# Altium PCB Gateway.PcbDoc (part 2 of 2)
Units mil, origin at the board's own origin, x right, y up, seen from the top; angles counter-clockwise.
Board outline 3149.61 x 3909.45 mil, 2 copper layers (Top Layer, Bottom Layer); 140 components, 140 nets, 576 pads, 80 vias.
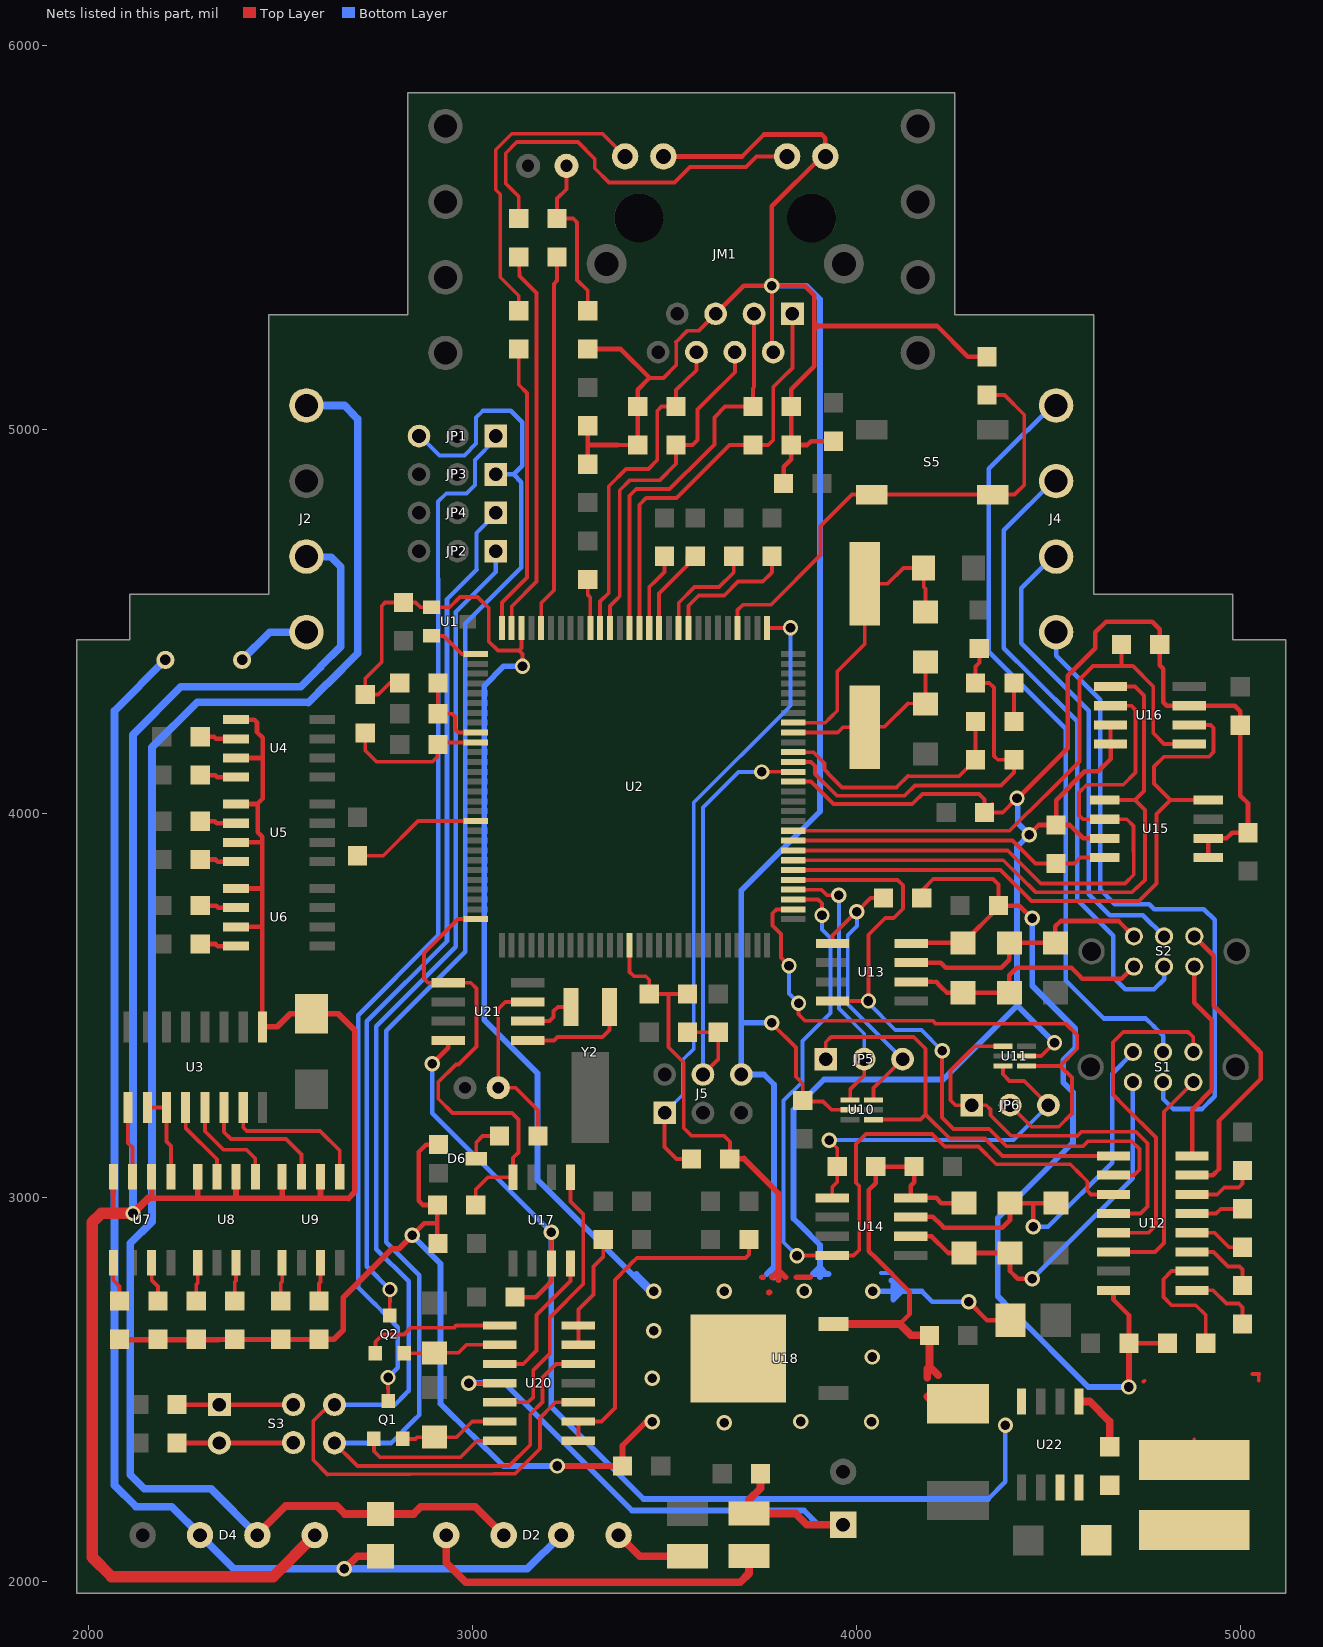
[diagram p2: the nets of this part, all layers, seen from the top]

## Via types
v1: diameter 40, hole 25, Top Layer to Bottom Layer, 80 vias

## Nets (pads, with @x,y where several pads share a name; then routed paths per layer and width w, separated by ;. In a path a pad name is that pad's centre, name@x,y a point inside that pad or via, vN(x,y) a via of type N, cw(c..) or ccw(c..) an arc to the next point about the centre after c; other vN are vias at no path point) (continued)
IIC_1: R28.2 U2.112 U17.4 U21.5 | length 1255.8
  Top Layer w10: R28.2@3008,2980 3008,3020 3040.2,3052.2 U17.4@3105,3052.2 3105,3102.94 3119,3116.94 3119,3184 3119,3203 3102.51,3219.49 2947.83,3219.49 2910.43,3256.89 2910.43,3300.2 2956.13,3345.89 2963,3345.89 3009.86,3392.75 3009.86,3395.19 3009.86,3544.14 2995,3559 U21.5@2936.65,3559 2884,3559 2873,3570 2873,3636 2961.69,3724.69 U2.112@3008.23,3724.69
IO_AAG_0: JP1.1 Q1.3 | length 2756
  Top Layer w10: v1(2779.53,2530.51) Q1.3@2780,2469.21
  Bottom Layer w10: 2745,2722 2745.52,2722 ; 2910,4611 2910,4813 2931,4834 2984,4834 3006,4856 3006,4921 JP1.1@3060.16,4975.16 ; JP1.1@3060.16,4974.53 JP1.1@3060.16,4983.39
  Bottom Layer w12: 2745,2722 2702,2765 2701.77,3469.5 2701.77,3474.77 2900,3673 2910,3683 2910,4611 ; 2745.52,2722 2779.53,2687.99 2779.53,2687.47 2805,2662 2805,2555.98 v1(2779.53,2530.51) ; JP1.1@3060.16,4975.16 JP1.1@3060.16,4983.39
IO_AAG_1: JP4.1 Q2.3 | length 2255.2
  Top Layer w10: Q2.3@2784,2692.21 v1(2784.45,2759.84)
  Bottom Layer w10: 3009.84,4634.84 3009.84,4730.31 3060.16,4780.63 JP4.1@3060.16,4783.39
  Bottom Layer w12: v1(2784.45,2759.84) 2725,2819 2724.41,2819.59 2724.41,3458.66 2933.07,3667.32 2933.07,4558.07 3009.84,4634.84
IO_AAG_2: JP2.1 S3.4 U20.10 | length 3561.4
  Top Layer w10: S3.4@2632.78,2465.91 2633.78,2465.91 2584.78,2416.91 2584.78,2334.91 2584.78,2315.22 2622,2278 3055,2280 3110,2280 3175,2345 3175,2425 3208.51,2458.51 3208.51,2458.87 3215.64,2466 U20.10@3275.36,2466
  Bottom Layer w12: S3.4@2640,2460 2797.6,2460 2826,2488.4 2826,2489 2833,2496 2833,2751 2833,2781 2749.02,2864.98 2749.02,2871.98 2749.02,2875.98 2749,3446 2956,3653 2956,4525 3060.16,4629.16 JP2.1@3060.16,4683.39
IO_AAG_3: JP1.3 JP3.1 S3.3 U20.12 | length 4338.1
  Top Layer w10: S3.3@2634.09,2365.91 2633.78,2365.91 2699.68,2300 3040,2300 3095,2300 3150,2355 3150,2435 3182,2467 3182,2531 3217,2566 U20.12@3275.36,2566
  Bottom Layer w10: JP1.3@2860.16,4983.39 2863.07,4983.39 2913.39,4933.07 2978.35,4933.07 3008.86,4963.58 3008.86,5031.5 3026.57,5049.21
  Bottom Layer w12: S3.3@2640,2360 2788,2360 2848,2420 2861,2433 2861,2797 2848,2810 2848,2809.75 2775,2882.75 2775,3434 2981,3640 2981,4495 3125.97,4639.97 3126.97,4639.97 3126.97,4647.97 3126.97,4863.19 3106.81,4883.35 ; 3026.57,5049.21 3099.41,5049.21 3128.94,5019.69 3128.94,4905.51 3106.81,4883.39 JP3.1@3060.16,4883.39
NetBT1_1: BT1.1 R42.1 U21.3 | length 484
  Top Layer w10: U21.3@3143.35,3509 3085.39,3509 3085,3509 3066.61,3490.61 BT1.1@3066.61,3285.56 3111.44,3285.56 3170,3227 R42.1@3170,3160
NetC1_1: C1.1 R2.1 U2.48 Y1.1 | length 474.1
  Top Layer w10: U2.48@3835,4210.91 U2.48@3835,4210.91 3951.06,4210.91 3964.8,4224.64 Y1.1@4021.42,4224.64 4073.64,4226.64 4134,4287 C1.1@4180,4285 ; C1.1@4179.92,4265.08 4179.92,4363.35
NetC2_1: C2.1 R2.2 U2.49 Y1.2 | length 776.1
  Top Layer w10: U2.49@3835,4236.5 3918.58,4236.5 3932.36,4250.28 3949.8,4267.72 3949.8,4370.08 4021.42,4441.69 Y1.2@4021.42,4598.66 4081,4598.66 4122.34,4640 C2.1@4175,4640 4175,4590 4180,4585 R2.2@4180,4525
NetC3_2: C3.2 L1.1 U2.93 | length 243.5
  Top Layer w10: C3.2@2907.87,4260 C3.2@2914.21,4260 ; L1.1@2910,4360 C3.2@2910,4260 2946,4260 2953.74,4252.26 2953.74,4220.47 2963.31,4210.91 U2.93@3008.23,4210.91
NetC4_1: C4.1 U2.102 | length 345.8
  Top Layer w10: C4.1@2700,3890 2766.97,3890 2857.56,3980.59 2871.77,3980.59 U2.102@3008.23,3980.59
NetC6_1: C6.1 U2.65 | length 351.3
  Top Layer w10: U2.65@3562.36,4483.54 3562.36,4541.35 3589,4568 3655.57,4568 3691.57,4604 3755.7,4604 3778.7,4627 ; 3780,4628.3 C6.1@3780,4670
NetC9_2: C9.2 U2.68 | length 217.3
  Top Layer w10: U2.68@3485.59,4483.54 3485.59,4572.83 3560,4647.24 C9.2@3560,4670
NetC10_2: C10.2 U2.69 | length 203.2
  Top Layer w10: U2.69@3460,4483.54 3460,4590 3480,4609.57 3500,4629.57 C10.2@3500,4670
NetC12_2: C12.2 U2.75 | length 125.7
  Top Layer w10: C12.2@3300,4606.54 3300,4569.09 3306.46,4562.64 U2.75@3306.46,4483.54
NetC13_2: C13.2 R4.1 U2.46 | length 650.5
  Top Layer w10: U2.46@3835,4159.73 3887.52,4159.73 3912.4,4134.84 3916.34,4130.91 3916.34,4114.17 3935.04,4095.47 3962.6,4067.91 4103.91,4067.91 ; 4105.77,4069.77 4134,4098 4267,4097 C13.2@4310,4140 R4.1@4310,4240
NetC16_2: C16.2 R4.2 | length 100
  Top Layer w10: R4.2@4410,4240 C16.2@4410,4340
NetC19_2: C19.2 L2.1 U2.94 | length 386.5
  Top Layer w10: L2.1@2720,4210 2720,4164 2749.16,4134.84 2765.75,4134.84 2895.67,4134.84 2907.87,4147.05 2907.87,4180 2913.19,4185.32 U2.94@3008.23,4185.32
NetC20_2: C20.2 J5.4 R26.2 U2.44 | length 1175.5
  Top Layer w10: R26.2@3560,3430 C20.2@3640,3430 3640,3360 J5.4@3600,3320 ; v1(3752.95,4108.27) 3753.23,4108.54 U2.44@3835,4108.54
  Bottom Layer w10: J5.4@3600,3320 3600,4015.35 3692.91,4108.27 v1(3752.95,4108.27)
NetC21_1: C21.1 U12.3 | length 192.7
  Top Layer w10: U12.3@4874.22,2857.71 4930.29,2857.71 4968,2820 4998,2820 5006,2812 C21.1@5006,2770
NetC21_2: C21.2 U12.1 | length 193.3
  Top Layer w10: U12.1@4874.22,2757.71 4929.29,2757.71 4964,2723 4996,2723 5006,2713 C21.2@5006,2670
NetC22_1: C22.1 U12.4 | length 147.4
  Top Layer w10: U12.4@4874.22,2907.71 4932.29,2907.71 4970,2870 C22.1@5006,2870
NetC22_2: C22.2 U12.5 | length 136.9
  Top Layer w10: U12.5@4874.22,2957.71 4936.71,2957.71 4949,2970 C22.2@5006,2970
NetC25_2: C25.2 U12.2 | length 332.4
  Top Layer w10: U12.2@4874.22,2807.71 4820.95,2807.71 4799.69,2786.45 4799.69,2740.31 4821,2719 4884,2719 4910,2693 C25.2@4910,2620
NetC26_1: C26.1 U12.6 | length 177.5
  Top Layer w10: U12.6@4874.22,3007.71 4939.71,3007.71 4958,3026 4996,3026 5006,3036 C26.1@5006,3070
NetC37_1: C37.1 D3.2 L3.1 U22.8
NetC37_2: C37.2 U22.1 | length 167.6
  Top Layer w20: U22.1@4579.92,2468.2 4607.58,2468.2 4660,2415.79 C37.2@4660,2350
NetD2_1: D2.1 L5.1 | length 202.8
  Top Layer w20: D2.1@3380,2120 3435.12,2064.88 L5.1@3560,2064.88
NetD2_2: D2.2 D4.2 F1.2 V1.2 | length 3604
  Top Layer w20: v1(2665,2032) 2666,2032 2698.88,2064.88 V1.2@2760,2064.88
  Bottom Layer w20: F1.2@2199.37,4400 2067,4268 2066.93,4228.35 2066.93,2250.07 2123,2194 2216,2194 2289.61,2120.39 D4.2@2289.61,2120 2290,2120 2378,2032 3142.39,2032 D2.2@3230.39,2120
NetD2_3: D2.3 L4.1 | length 937.4
  Top Layer w20: D2.3@2931.18,2120 2931.18,2047.82 2981.95,1997.05 3595.81,1997.05 3620.05,1997.05 3697.05,1997.05 3720,2020 L4.1@3720,2065.88
NetD2_4: D2.4 D4.4 J2.4 V1.1 | length 4433.5
  Top Layer w20: D4.4@2439.21,2120 2439.21,2122.21 2513,2196 2646,2196 2666.88,2175.12 V1.1@2760,2175.12 2846.12,2175.12 2865,2194 3006.79,2194 D2.4@3080.79,2120
  Bottom Layer w20: 2164.57,4172.26 2282.32,4290 2572,4289 2621.58,4338.58 2622.05,4338.58 2700.79,4417.32 2700.79,5027.56 2666,5063 J2.4@2566.93,5062.99 ; 2164.57,4172.26 2164.57,2937.57 2164.57,2936.57 2108,2880 2108,2304 2108,2277 2144,2241 2318.21,2241 D4.4@2439.21,2120
NetD5_1: D5.1 R5.1 R6.1 | length 451.7
  Top Layer w10: R6.1@3300,5310 3300,5362 3272,5390 3272,5540 3262,5550 R5.1@3220,5550 3220,5602 3244.33,5626.33 D5.1@3244.33,5687.52 ; D5.1@3244.33,5687.52 3244.33,5684.33 D5.1@3244.33,5687.52
NetD6_3: D6.3 R42.2 | length 111
  Top Layer w10: D6.3@3009.21,3100 3009.21,3143.21 3026,3160 R42.2@3070,3160
NetF1_1: F1.1 J2.1 | length 200.7
  Bottom Layer w20: F1.1@2399,4400 2471,4472 J2.1@2566.93,4472.44 J2.1@2566.93,4475.39
NetJ4_1: J4.1 S1.2 | length 1711.3
  Bottom Layer w12: J4.1@4520,4472.44 4520,4411 4635,4296 4635,3890 4635,3802 4673,3764 4763,3764 4776,3751 4792,3751 4905,3751 4933,3723 4933,3263 4900,3230 4825,3230 4798.74,3256.26 S1.2@4798.74,3300
NetJ4_2: J4.2 S2.2 | length 1250.4
  Bottom Layer w10: J4.2@4509.53,4676.85 J4.2@4520,4676.85
  Bottom Layer w12: J4.2@4520,4676.85 4518.85,4676.85 4429,4587 4429,4444 4480,4393 4605,4268 4605,3875 4605,3790 4660,3735 4746.26,3735 S2.2@4801.26,3680
NetJ4_3: J4.3 S2.5 | length 1667.5
  Bottom Layer w10: J4.3@4520,4870.39 J4.3@4520,4873.7
  Bottom Layer w12: J4.3@4520,4873.7 4519.7,4873.7 4384,4738 4384,4431 4456,4359 4575,4240 4575,3775 4669,3681 4669,3573 4700,3542 4775,3542 4801.26,3568.26 S2.5@4801.26,3601.26
NetJ4_4: J4.4 S1.5 | length 2020.1
  Bottom Layer w10: J4.4@4520,5068.58 J4.4@4520,5070.55
  Bottom Layer w12: J4.4@4517.55,5070.55 4371,4924 4345,4898 4345,4421 4438,4328 4545,4221 4545,3565 4644,3466 4754,3466 4775,3445 4798.74,3421.26 S1.5@4798.74,3378.74
  Bottom Layer w15: J4.4@4517.55,5070.55 J4.4@4520,5070.55
NetJ5_1: J5.1 R1.2 U2.57 | length 1632.9
  Top Layer w10: J5.1@3500,3220 3500,3130.91 3530.91,3100 R1.2@3570,3100 ; U2.57@3767.09,4483.54 3827.54,4483.54 v1(3828,4484)
  Bottom Layer w10: J5.1@3500,3220 3547.24,3267.24 3547.24,3358.27 3575.79,3386.81 ; 3575.79,4028.54 3815.94,4268.7 3828,4280.76 v1(3828,4484) ; 3576,3387 3576,4028.73
NetJM1_1: JM1.1 R7.2 U2.70 | length 1088.9
  Top Layer w10: U2.70@3434.41,4483.54 3434.41,4780.87 3434.41,4804.41 3452,4822 3531,4822 3669,4960 R7.2@3730,4960 3770,4960 3783,4973 3783,5110.76 3805.12,5132.87 3833.03,5160.79 JM1.1@3833.03,5301.93
NetJM1_3: JM1.3 R8.1 U2.71 | length 1054.9
  Top Layer w10: U2.71@3408.82,4483.54 3408.82,4808.42 3408.82,4827.82 3426,4845 3513,4845 3605,4937 3629.61,4961.61 3629.61,5032 3657.61,5060 3696,5060 ; 3688,5060 R8.1@3730,5060 3730,5108 3733.03,5111.03 3733.03,5163.15 JM1.3@3733.03,5301.93 ; R8.1@3713.43,5068.86 R8.1@3713.58,5068.03
NetJM1_4: JM1.4 R9.2 U2.73 | length 928.7
  Top Layer w10: U2.73@3357.64,4483.54 3357.64,4540.46 3376.97,4559.79 3376.97,4559.97 3383,4566 3383,4842 3409,4868 3487,4868 3530,4911 R9.2@3530,4960 3573,4960 3586,4973 3586,5052.54 3612,5078.54 3683.03,5149.57 JM1.4@3683.03,5201.93 ; R9.2@3550.2,4956.73 R9.2@3553.46,4960
NetJM1_6: JM1.6 R10.1 U2.74 | length 879.1
  Top Layer w10: U2.74@3332.05,4483.54 3332.05,4552.41 3354.33,4574.69 3354.33,4852.63 3399.61,4897.91 3457.91,4897.91 3481,4921 3481,5049 3492,5060 R10.1@3530,5060 3530,5103 3555,5128 3583.03,5154.88 JM1.6@3583.03,5201.93
NetJM1_GK: JM1.GK R11.1 | length 824.4
  Top Layer w10: R11.1@3120,5310 3120,5349 3071.85,5397.15 3071.85,5501.97 3071.85,5613.15 3060,5625 3060,5729.29 3101.71,5771 3338,5771 3394.79,5714.21 3397.01,5714.21 JM1.GK@3397.01,5711.77
NetJM1_YK: JM1.YK R12.2 | length 1018.8
  Top Layer w10: R12.2@3120,5550 3120,5607 3086,5641 3086,5720 3115,5749 3274,5749 3318,5705 3318,5681 3355,5644 3384,5644 3526,5644 3566,5684 3712,5684 3739.77,5711.77 JM1.YK@3819.06,5711.77 ; JM1.YK@3819.06,5711.77 3818.83,5709.77 JM1.YK@3819.06,5711.77
NetJP5_1: JP5.1 U10.1 U12.9 | length 1172.1
  Top Layer w10: JP5.1@3920,3361 JP5.1@3920,3360 3920,3404 3934,3418 3977,3418 4147,3418 ; U10.1@4044.51,3202.41 4166.41,3202.41 4180,3216 ; U12.9@4669.5,3107.71 4456.29,3107.71 4380.29,3107.71 4335,3153 4243,3153 4180,3216 ; 4147,3418 4149,3418 ; 4147,3418 4149,3418 ; 4149,3418 4180,3387 4180,3216
NetJP5_3: JP5.3 R30.1 U10.3 U13.1 | length 781.7
  Top Layer w10: U13.1@3937.65,3661.39 3937.65,3681.74 v1@3999.02,3743.11 ; v1(4000.98,3744.09) 4036.89,3780 R30.1@4070,3780 ; U10.3@4044.51,3253.59 4044.51,3284.51 4073.51,3313.51 JP5.3@4120,3360
  Bottom Layer w10: v1(4000.98,3744.09) 4000.98,3706.69 3977.36,3683.07 3977.36,3502.64 3999.65,3480.35 JP5.3@4120,3360
NetJP6_1: JP6.1 U11.1 U12.12 | length 1157.8
  Top Layer w10: JP6.1@4324,3239 JP6.1@4300,3240 ; 4325.59,3393.59 U11.1@4381.49,3393.59 4308.59,3393.59 4288,3373 4245,3330 4245,3253 4258,3240 JP6.1@4300,3240 ; U12.12@4669.5,2957.71 4735.72,2957.71 4739.65,2957.71 4758.35,2976.41 4758,3141 4728,3171 4586,3171 4575,3160 4573,3160 4402,3161 4349,3214 4349,3229 4338,3240 JP6.1@4300,3240
NetJP6_3: JP6.3 R31.1 U11.3 U14.1 | length 959.6
  Top Layer w10: v1(3929,3149) 3950,3128 R31.1@3950,3080 3950,3040 3936.65,3026.65 U14.1@3936.65,2998.62 U14.1@3936.65,3010.2 ; U11.3@4381.49,3342.41 4381.49,3320.51 4399,3303 4437,3303 JP6.3@4500,3240
  Bottom Layer w10: v1(3929,3149) 4409,3149 JP6.3@4500,3240 JP6.3@4499,3240
NetQ1_1: Q1.1 U20.7 | length 384.6
  Top Layer w10: Q1.1@2742.6,2370.79 2742.6,2338.4 2758,2323 2969,2323 3012,2366 U20.7@3070.64,2366
NetQ1_2: Q1.2 R40.1 U20.6 | length 272
  Top Layer w10: Q1.2@2817.4,2370.79 2850.79,2370.79 2855,2375 2958,2375 2999,2416 3006,2416 U20.6@3070.64,2416
NetQ2_1: Q2.1 U20.1 | length 371.4
  Top Layer w10: Q2.1@2746.6,2593.79 2746.6,2623.6 2766,2643 2821,2643 2838,2660 2951,2660 2957,2666 2995,2666 U20.1@3070.64,2666
NetQ2_2: Q2.2 R41.1 U20.2 | length 265.2
  Top Layer w10: Q2.2@2821,2593.39 Q2.2@2821.4,2593.79 ; Q2.2@2821.4,2587.6 Q2.2@2821.4,2593.79 ; U20.2@3070.64,2616 3013,2616 2984,2616 2963,2595 R41.1@2900,2595 2898.79,2593.79 Q2.2@2821.4,2593.79
NetR3_2: R3.2 U2.66 | length 283.3
  Top Layer w10: U2.66@3536.77,4483.54 3536.77,4549.11 3577.76,4590.09 3641.8,4590.09 3678.7,4627 3680,4628.3 R3.2@3680,4670
NetR11_2: R11.2 U2.84 | length 764.6
  Top Layer w10: U2.84@3076.14,4483.54 3076.14,4549.57 3141.73,4615.16 3141.73,4614.17 3141.73,5064.96 3141.73,5095.27 3120,5117 R11.2@3120,5210
NetR12_1: R12.1 U2.83 | length 1011.6
  Top Layer w10: U2.83@3101.73,4483.54 3101.73,4539.72 3166.34,4604.33 3166.34,5081.91 3166.34,5355.66 3122,5400 R12.1@3120,5450
NetR14_1: R14.1 U4.2 | length 95.6
  Top Layer w12: R14.1@2290,4200 2326,4200 2331.39,4194.61 U4.2@2383.35,4194.61
NetR15_1: R15.1 U4.4 | length 95.6
  Top Layer w12: R15.1@2290,4100 2329,4100 2334.39,4094.61 U4.4@2383.35,4094.61
NetR16_1: R16.1 U5.2 | length 95.6
  Top Layer w12: R16.1@2290,3980 2328,3980 2333.39,3974.61 U5.2@2383.35,3974.61
NetR17_1: R17.1 U5.4 | length 95.6
  Top Layer w12: R17.1@2290,3880 2330,3880 2335.39,3874.61 U5.4@2383.35,3874.61
NetR18_1: R18.1 U6.2 | length 95.6
  Top Layer w12: R18.1@2290,3760 2332,3760 2337.39,3754.61 U6.2@2383.35,3754.61
NetR19_1: R19.1 U6.4 | length 95.6
  Top Layer w12: R19.1@2290,3660 2330,3660 2335.39,3654.61 U6.4@2383.35,3654.61
NetR20_2: R20.2 U7.1 | length 106
  Top Layer w10: U7.1@2063.7,2829.29 2063.7,2784.3 2080,2768 R20.2@2080,2730
NetR21_2: R21.2 U7.3 | length 106
  Top Layer w10: U7.3@2163.7,2829.29 2163.7,2784.3 2180,2768 R21.2@2180,2730
NetR22_2: R22.2 U8.1 | length 100.8
  Top Layer w10: R22.2@2280,2730 2280,2773 2283.7,2776.7 U8.1@2283.7,2829.29
NetR23_2: R23.2 U8.3 | length 100.8
  Top Layer w10: R23.2@2380,2730 2380,2779 2383.7,2782.7 U8.3@2383.7,2829.29
NetR24_2: R24.2 U9.1 | length 100.8
  Top Layer w10: R24.2@2500,2730 2500,2777 2503.7,2780.7 U9.1@2503.7,2829.29
NetR25_2: R25.2 U9.3 | length 100.8
  Top Layer w10: R25.2@2600,2730 2600,2776 2603.7,2779.7 U9.3@2603.7,2829.29
NetR27_2: R27.2 S5.2 U2.60 | length 1273.9
  Top Layer w10: U2.60@3690.32,4483.54 3690.32,4530.32 3704,4544 3746,4544 3777.27,4544 3906.5,4673.23 3906.5,4749.02 3988.19,4830.71 S5.2@4040,4830.71 4411.71,4830.71 4437,4856 4437,5039 4386,5090 R27.2@4340,5090
NetR46_1: R46.1 U20.8 U20.9 | length 921.6
  Top Layer w10: U20.8@3275.36,2366 U20.9@3275.36,2416 3336,2416 3371,2451 3371,2785 3405,2819 3400.55,2815 3419.21,2833.66 3419.66,2833.66 3425,2839 3428,2842 3711,2842 3720,2851 R46.1@3720,2890
NetR47_1: R47.1 U20.13 U20.14 | length 303.6
  Top Layer w10: U20.13@3275.36,2616 U20.14@3275.36,2666 ; U20.14@3277.36,2668 U20.14@3275.36,2666 ; R47.1@3340,2890 3340,2844.92 3315,2819.92 3315,2747 3275.36,2707.36 U20.14@3275.36,2666
NetR48_2: pad.0 R48.2 S3.1 | length 311.4
  Top Layer w12: R48.2@2230,2460 S3.1@2340,2460 ; S3.1@2345.91,2465.91 S3.1@2340,2460 ; pad.0@2533,2460 S3.1@2340,2460
NetR49_2: pad.1 R49.2 S3.2 | length 302
  Top Layer w12: R49.2@2230,2360 S3.2@2340,2360 pad.1@2532,2360
NetS1_3: S1.3 U12.14 | length 593.7
  Top Layer w10: U12.14@4669.5,2857.71 4777.45,2857.71 4800.68,2880.94 4800.68,3127.98 4800.68,3128.68 ; 4801,3129 4801,3189 4801,3223 4877.48,3299.48 S1.3@4877.48,3300 S1.3@4877.48,3297.48
NetS1_4: S1.4 U12.13 | length 906.8
  Top Layer w10: U12.13@4669.5,2907.71 4760.52,2907.71 4780.01,2927.2 4780.01,3143.73 4780.01,3155.99 4699,3237 4668,3268 4668,3282 4668,3404 4695,3431 4864,3431 4877.48,3417.52 S1.4@4877.48,3378.74
NetS2_1: S2.1 U12.7 | length 799.9
  Top Layer w12: U12.7@4874.22,3057.71 4928.24,3057.71 4944.38,3073.85 4944.38,3160.46 4944.38,3199.52 5042,3297.14 5053.15,3308.29 5053.15,3377.05 5042.31,3387.89 5042.11,3387.89 4931,3499 4931,3629 S2.1@4880,3680
NetS2_6: S2.6 U12.8 | length 534.1
  Top Layer w12: U12.8@4874.22,3107.71 4874.22,3129.68 4874.22,3148.22 4874.22,3228.22 4926,3280 4926,3461 4880,3507 S2.6@4880,3601.26
NetU1_2: U1.2 U2.85 | length 134.9
  Top Layer w10: U1.2@2892.76,4462.6 2924.4,4462.6 2971.37,4415.63 U2.85@3008.23,4415.63
NetU3_1: U3.1 U7.7 | length 184.7
  Top Layer w10: U3.1@2102.28,3233.7 2102.28,3179.93 2102.28,3140.83 2113.7,3129.42 U7.7@2113.7,3053.7
NetU3_2: U3.2 U3.3 U7.5 | length 234.7
  Top Layer w10: U3.2@2152.28,3233.7 U3.3@2202.28,3233.7 2202.28,3145.16 2213.7,3133.74 U7.5@2213.7,3053.7
NetU3_4: U3.4 U8.7 | length 213.7
  Top Layer w10: U3.4@2252.28,3233.7 2252.28,3180.79 2333.7,3099.37 U8.7@2333.7,3053.7
NetU3_5: U3.5 U8.5 | length 269.6
  Top Layer w10: U3.5@2302.28,3233.7 2302.28,3172.13 2350.39,3124.02 2410.43,3124.02 2433.7,3100.75 U8.5@2433.7,3053.7
NetU3_6: U3.6 U9.7 | length 347.4
  Top Layer w10: U3.6@2352.28,3233.7 2352.28,3169.37 2370.08,3151.57 2513.35,3151.57 2553.7,3111.22 U9.7@2553.7,3053.7
NetU3_7: U3.7 U9.5 | length 465.8
  Top Layer w10: U3.7@2402.28,3233.7 2402.28,3182.36 2411.42,3173.23 2602.36,3173.23 2653.7,3121.89 ; 2604.33,3171.26 2653.7,3121.89 ; U9.5@2653.7,3053.7 2653.7,3121.89
NetU17_1: U17.1 U20.5 | length 733.4
  Top Layer w10: U20.5@3070.64,2466 3144,2466 3158,2480 3158,2550 3201,2593 3201,2687 3288.15,2774.15 3288.15,2956.85 3287.4,2956.85 3255,2989.25 U17.1@3255,3052.2
NetU17_8: U17.8 U20.3 | length 373.9
  Top Layer w10: U20.3@3070.64,2566 3131.58,2566 3166.19,2600.61 3166.19,2693.19 3255,2782 U17.8@3255,2827.8
NetU21_1: U21.1 Y2.2 | length 284
  Top Layer w10: U21.1@3143.35,3409 3212,3409 3221,3418 3338,3418 3356.22,3436.22 Y2.2@3356.22,3496.1
NetU21_2: U21.2 Y2.1 | length 137
  Top Layer w10: U21.2@3143.35,3459 3200,3459 3211,3470 3211,3485 3222.1,3496.1 Y2.1@3256.22,3496.1
RED_LED: R5.2 U2.80 | length 983.6
  Top Layer w10: U2.80@3178.5,4483.54 3178.5,4541.69 3178.5,4548.58 3211.61,4581.69 3211.61,5379.92 3220,5388.31 R5.2@3220,5450
RS485_A+: R32.1 R36.2 S2.4 U13.6 | length 683.2
  Top Layer w10: 4197.45,3561.39 4207.29,3561.39 ; 4398,3578 4398,3579 ; R36.2@4401.19,3550.4 4403.95,3547.65 R36.2@4403.95,3554.5 ; 4579,3578 4580,3578
  Top Layer w12: U13.6@4142.37,3561.39 4197.45,3561.39 ; 4207.29,3561.39 4218.27,3550.4 4235.68,3533 R32.1@4278,3533 R36.2@4398,3533 4398,3578 ; 4398,3579 4417,3598 4560,3598 4580,3578 4588,3569 4690.26,3569 S2.4@4722.52,3601.26
RS485_A-: R33.2 R36.1 S2.3 U13.7 | length 703.8
  Top Layer w12: U13.7@4142.37,3611.39 4199.61,3611.39 4219.3,3611.39 4232.69,3598 4377,3598 4398,3619 R36.1@4398,3663 R33.2@4518,3663 4518,3706 4532,3720 4682.52,3720 S2.3@4722.52,3680
RS485_B+: R34.1 R37.2 S1.1 U14.6 | length 1011.1
  Top Layer w12: U14.6@4141.38,2898.62 4196.38,2898.62 4196.38,2897.62 4239,2855 R34.1@4280,2855 R37.2@4400,2855 4400,2808 4420,2788 v1(4458,2788)
  Bottom Layer w12: v1(4458,2788) 4720,3050 4720,3229 4720,3251.5 S1.1@4720,3300
RS485_B-: R35.2 R37.1 S1.6 U14.7 | length 1101.5
  Top Layer w12: U14.7@4131.53,2949.8 4198.82,2949.8 4221.62,2927 4227.62,2921 4380,2921 4399,2940 4400,2940 R37.1@4400,2985 R35.2@4520,2985 ; v1(4460,2923) 4460,2985
  Bottom Layer w10: S1.6@4720,3376 S1.6@4720,3378.74
  Bottom Layer w12: v1(4460,2923) 4499,2923 4666,3090 4666,3129 4666,3322 S1.6@4720,3376
SPI_0: U2.36 U15.2 U16.6 | length 1673.4
  Top Layer w10: U2.36@3835,3903.82 4394.18,3903.82 4472.27,3825.73 4480,3818 4699.89,3818 4722.44,3840.55 4722,3957 4722,3967 4704,3985 U15.2@4646.65,3985 4596,3985 4590,3985 4580,3995 4580,4055 4600,4075 4695,4075 4727,4107 4727,4270 4716.25,4280.75 U16.6@4661.93,4280.75
SPI_1: U2.34 U15.8 U16.2 | length 1734.9
  Top Layer w10: U2.34@3835,3852.64 4375.58,3852.64 4445.74,3782.48 4445.74,3782.26 4456,3772 4736,3772 4782,3818 4782,3999 4818,4035 ; U16.2@4866.65,4230.75 4918.86,4230.75 4922.25,4230.75 4930,4223 4930,4160 4918,4148 4801,4148 4775,4122 4775,4078 4818,4035 ; U15.8@4916.34,4035 4818,4035
SPI_2: U2.35 U15.1 U16.5 | length 1640.7
  Top Layer w10: U2.35@3835,3878.23 4382.41,3878.23 4466,3795 4718.2,3795 4751.97,3826.77 4751.97,4008.86 4725.83,4035 ; U15.1@4646.65,4035 4725.83,4035 ; U16.5@4661.93,4330.75 4725.35,4330.75 4725.35,4330.65 4749,4307 4749,4058.17 4725.83,4035
SPI_3: R38.2 U2.37 U15.4 | length 842.5
  Top Layer w10: U2.37@3835,3929.41 4406.59,3929.41 4466,3870 R38.2@4520,3870 4568,3870 4583,3885 U15.4@4646.65,3885
SPI_4: R39.2 U2.38 U16.1 | length 1546
  Top Layer w10: U2.38@3835,3955 4398.9,3955 4448.82,4004.92 4449.92,4004.92 4535,4090 4580.71,4135.71 4580.71,4183.07 4580.71,4349.41 4581.41,4349.41 4616.12,4384.12 4719.88,4384.12 4773,4331 4773,4209.28 4801.53,4180.75 U16.1@4866.65,4180.75 ; 4690,4384.12 R39.2@4690,4440
UART_0: U2.31 U12.11 U14.4 | length 2300.8
  Top Layer w10: U2.31@3835,3775.87 3900.13,3775.87 3910,3766 v1(3910,3735) ; v1(3845,2848) 3845.62,2848.62 U14.4@3936.65,2848.62 3992.62,2848.62 4007,2863 4007,3029.91 3999,3037.91 3999,3139 4025,3165 4197,3165 4230,3132 4295,3132 4318,3132 4364,3086 4557,3086 4588.26,3054.74 ; 4573,3070 4601,3042 4601,3018 4611.29,3007.71 U12.11@4669.5,3007.71
  Bottom Layer w10: v1(3845,2848) 3810,2883 3810,3252 3859,3301 3859,3407 3932,3480 3932,3676 3910,3698 3910,3732 v1(3910,3735)
UART_1: JP6.2 U2.30 U11.4 | length 1626.8
  Top Layer w10: v1@3821,3609 v1(3824,3603) 3824,3604 3803,3625 3803,3686 3781,3708 3781,3740 3791.28,3750.28 U2.30@3835,3750.28 ; v1(3849,3506) 3849,3477 3866,3460 4199,3460 4207,3452 4521,3452 4546,3452 4575,3423 4575,3387 4530.41,3342.41 ; JP6.2@4400,3240 4456,3184 4527,3184 4561,3218 4561,3311.82 4530.41,3342.41 ; U11.4@4442.51,3342.41 4491.41,3342.41 4530.41,3342.41
  Bottom Layer w10: v1(3824,3603) 3824,3559 3824,3531 v1(3849,3506)
UART_2: U2.33 U12.10 U13.4 | length 1845.9
  Top Layer w10: U2.33@3835,3827.05 4099.13,3827.05 4107.01,3827.05 4121.06,3812.99 4121,3753 4121,3752 4097,3728 4075,3728 4031.11,3684.11 4031.11,3674.77 v1(4031.11,3511.39) U13.4@3937.65,3511.39 ; v1(4223,3382) 4223,3208 4253,3178 4346,3178 4391,3133 4590,3133 4603,3146 4717,3146 4737,3126 4737,3072 4722.71,3057.71 U12.10@4669.5,3057.71
  Bottom Layer w10: v1(4031.11,3511.39) 4031.11,3505.89 4101,3436 4131,3436 4169,3436 v1(4223,3382)
UART_3: JP5.2 U2.32 U10.4 | length 700.9
  Top Layer w10: U2.32@3835,3801.46 3908.54,3801.46 3923,3787 v1(3954,3787) ; U10.4@3983.49,3253.59 3983.49,3280.49 4020,3317 JP5.2@4020,3360
  Bottom Layer w10: v1(3954,3787) 3954,3715 3954,3647 3954,3492 4020,3426 JP5.2@4020,3360
VCC_3V: C7.2 C8.2 C11.2 C14.2 C15.2 C17.2 C18.2 C28.1 C29.1 C32.2 C33.1 C36.2 D6.1 J5.6 JM1.2 JM1.5 JM1.GA JM1.YA L1.2 L2.2 R1.1 R6.2 R7.1 R8.2 R9.1 R10.2 R20.1 R21.1 R22.1 R23.1 R24.1 R25.1 R26.1 R27.1 R28.1 R29.2 R38.1 R39.1 U1.1 U2.14 U2.43 U2.82 U10.5 U11.5 U15.3 U15.5 U15.6 U16.3 U16.7 U16.8 U18.4 | length 18960.9
  Top Layer w10: L1.2@2810,4340 2784,4340 2754,4310 L2.2@2720,4310 2720,4352 2763,4395 2763,4541 2772,4550 2785,4550 C11.2@2820,4550 2851,4550 2863.6,4537.4 U1.1@2892.76,4537.4 2940.4,4537.4 2967,4564 3013,4564 3042,4535 3042,4448 3065.79,4424.21 3067.91,4424.21 3121.06,4424.21 3129.92,4415.35 v1(3129.92,4383.86) ; R29.2@2904.49,2899.61 R29.2@2910,2900 ; 3120.08,4424.21 3127.32,4431.46 U2.82@3127.32,4483.54 ; 3378,4960 R9.1@3430,4960 ; 3408.82,3597.18 3408.82,3587.18 3420,3576 3451,3576 3460,3567 C7.2@3460,3530 R26.1@3560,3530 ; 3408.82,3597.23 U2.14@3408.82,3656.77 ; 3460.63,5134.84 3497.05,5134.84 3530.51,5168.31 3530.51,5228.35 ; JM1.GA@3497.01,5699.01 JM1.GA@3497.01,5711.77 JM1.GA@3497.01,5707.64 ; 3510,3527 3510,3391 3550,3351 3550,3190.13 3550,3180.32 3569.88,3160.43 3654.53,3160.43 3670,3144.96 R1.1@3670,3100 ; 3529.65,5228.35 3530.51,5228.35 ; JM1.5@3610.98,5301.93 JM1.5@3633.03,5301.93 ; v1(3779,3455) 3779,3453 3842,3390 3842,3369 3842,3314 3860,3296 C36.2@3860,3252.41 ; v1@3779.53,5365.16 3779.53,5205.43 JM1.2@3783.03,5201.93 ; U2.43@3835,4082.95 3881.61,4082.95 3939.96,4024.61 4145.31,4024.61 4162.05,4041.34 4162.34,4041.34 4172,4051 4319,4051 4333.58,4036.42 C8.2@4333.58,4002.95 4380.95,4002.95 v1(4418,4040) ; C36.2@3871,3250 3913,3250 3935,3228 U10.5@3983.49,3228 ; JM1.YA@3909.61,5711.77 JM1.YA@3919.06,5711.77 ; JM1.YA@3915.51,5711.77 JM1.YA@3919.06,5711.77 ; JM1.YA@3919.06,5700.55 JM1.YA@3919.06,5711.77 ; C15.2@3919.96,4948.86 C15.2@3920,4948.82 ; C8.2@4353.46,4000 C8.2@4353.46,4025.47 ; U11.5@4442.51,3368 4481.19,3368 v1(4515.75,3402.56) ; U16.8@4661.93,4180.75 U16.7@4661.93,4230.75 ; 3530.51,5228.35 3560.04,5257.87 3589.57,5257.87 JM1.5@3633.03,5301.34 ; JM1.5@3633.03,5301.34 JM1.5@3633.03,5301.93 ; JM1.5@3633.03,5301.34 JM1.5@3633.03,5301.93
  Top Layer w12: v1(2843,2901) 2874,2932 2908,2932 ; R29.2@2908,2882 R28.1@2908,2980 2870,2980 2859,2991 2859,3118 2878.4,3137.4 D6.1@2910.79,3137.4 ; C14.2@3300,4910 C17.2@3300,5010 ; 3300,4960 3378,4960 ; R6.2@3300,5210 3385.47,5210 3460.63,5134.84 3430,5104.21 R10.2@3430,5060 R9.1@3430,4960 ; JM1.GA@3497.01,5711.77 3701.77,5711.77 3759,5769 3909,5769 3919.06,5758.94 3919.06,5751.94 JM1.YA@3919.06,5711.77 ; JM1.5@3633.03,5301.93 3706.1,5375 v1(3779.53,5375) 3865,5375 3890,5350 3890,5165 3830,5105 R8.2@3830,5060 R7.1@3830,4960 ; v1@3779.53,5365.16 3779.53,5581.69 JM1.YA@3909.61,5711.77 ; C18.2@3810,4860 3810,4903 3830,4923 R7.1@3830,4960 ; 3890,5260 3900,5270 3890,5280 3890,5285 ; 3890,5270 4210,5270 4290,5190 R27.1@4340,5190 ; C15.2@3940,4970 3882,4970 3872,4960 R7.1@3830,4960 ; v1(4292,2728) 4340,2680 C33.1@4400.94,2680 ; v1(4418,4040) 4420,4040 4550,4170 4550,4359 4622,4431 4622,4472 4650,4500 4770,4500 4790,4480 R39.1@4790,4440 4790,4386 4799.21,4376.79 4799.21,4355.31 4799.21,4289.37 4807.83,4280.75 U16.3@4866.65,4280.75 4938.25,4280.75 4985.25,4280.75 5000,4266 C29.1@5000,4230 5000,4046.26 5020,4026.26 C28.1@5020,3950 4979,3950 4964,3935 U15.6@4916.34,3935 U15.5@4916.34,3885 ; v1(4450,3945) 4475,3970 R38.1@4520,3970 ; U15.3@4646.65,3935 4591,3935 4556,3970 R38.1@4520,3970 ; U16.8@4661.93,4180.75 4661.93,4141.93 4630,4110 4595,4110 4520,4035 R38.1@4520,3970
  Top Layer w15: R20.1@2078.7,2628.03 R25.1@2600,2630 2639,2630 2663,2654 2663,2739 2790,2866 2808,2866 v1(2843,2901) ; v1(3220,2300) C32.2@3390,2300 3390,2353.58 3451.42,2415 v1(3468,2415) v1@3454,2415 ; R1.1@3670,3100 3706.69,3101.38 3706.69,3100.39 3772.64,3034.45 3772.64,3034.36 3784,3023 3797,3010 3797,2784 ; 3754,2792 3757,2792 ; 3772,2752 3773,2753 ; 3779,2792 3780,2792 3797,2809 ; 3797,2810 3815,2792 ; 3843.43,2792 3878.94,2792
  Bottom Layer w10: 4063,2803 4090,2803
  Bottom Layer w12: 4170,2755 4197,2728 v1(4292,2728)
  Bottom Layer w15: v1(2843,2901) 2843,2900 2907,2836 2916,2827 2916,2462 3080,2300 v1(3220,2300) ; v1(3129.92,4383.86) 3080.71,4383.86 3030,4332 3030,3611 3030,3462 3169,3323 3169,3046 3460,2755 v1(3472,2755) 3427,2800 ; 3700,3458 3703,3455 v1(3779,3455) ; J5.6@3702,3320 J5.6@3700,3320 ; J5.6@3703,3320 J5.6@3700,3320 ; 3766,2800 3785,2819 3785,2820 ; v1(3779.53,5375) 3870,5375 3905,5340 3905,4190 ; 3784,2791 3785,2792 3785,3294 3759,3320 J5.6@3700,3320 ; 3785,2817 3802,2800 ; 3905,2792 3905,2876 3856,2925 3836,2945 3836,3228 3915,3307 4226,3307 4418,3499 ; 3905,2818 3904,2818 ; 3905,4199 3905,4005 3700,3800 J5.6@3700,3320 ; 3922,2800 3904,2818 ; 3927,2800 3886,2800 3904,2818 ; v1(4042,2755) 4158,2755 4170,2755 ; 4090.98,2783.57 4098.54,2776 ; 4115,2755 4115,2753 4096.03,2734.03 4096.03,2778.51 4119,2755.54 4119,2755 ; v1@4420,4040 4420,3975 v1(4450,3945) 4418,3913 4418,3513 4418,3500.31 v1(4515.75,3402.56)
  other v1: 3655,2413 4039,2415 3855,2416 3468,2529 4041,2584 3472,2652 3655,2755 3864,2756
VCC_5V: C23.1 C24.1 C25.1 C27.1 C30.2 C34.1 C38.1 L3.2 R30.2 R31.2 R32.2 R34.2 U12.16 U13.8 U14.8 U17.7 U18.3 U21.8 U22.4 | length 6840.8
  Top Layer w10: U13.8@4142.37,3661.39 U13.8@4143.98,3663 ; R30.2@4170,3760 4173,3802 4199.8,3829.72 4334.65,3829.72 4347.28,3829.72 4355.28,3829.72 4370,3815 C23.1@4370,3780 ; R32.2@4276.07,3660.64 R32.2@4276.07,3687.07 ; C23.1@4370,3755 C23.1@4370,3760 ; C27.1@4710,2620 C27.1@4711.61,2619.09 ; 4748,2520 4750,2522 ; L3.2@4880,2315.79 4880,2369.74 ; 5032,2539.37 5048.37,2539.37 ; 5048,2523 5048,2535.17
  Top Layer w12: v1(2895,3348) 2936.65,3389.65 U21.8@2936.65,3409 ; C38.1@3110,2740 3164,2740 3190,2766 3205,2781 v1@3205,2906.77 ; 4112.96,2669.96 4138,2695 4138,2754 4051.18,2840.82 4032,2860 4032,3019 4050,3037 R31.2@4050,3080 C24.1@4150,3080 4150,3039 4141.38,3030.38 U14.8@4141.38,2998.62 4207.38,2998.62 4221,2985 R34.2@4280,2985 ; U13.8@4143.98,3663 R32.2@4278,3663 C23.1@4370,3755 ; C23.1@4370,3760 4424,3760 v1(4457.68,3727.36) ; U12.16@4669.5,2757.71 4669.5,2733.5 4710,2693 C27.1@4710,2620 C25.1@4810,2620
  Top Layer w15: v1(4709.65,2505.91) 4710,2506.26 C27.1@4710,2620
  Top Layer w20: U18.3@3941,2670 4102.04,2669.96 4112.96,2669.96 4142,2641 4190,2641 4190,2559 ; 4184,2530.17 4184,2553 4190,2559 ; C34.1@4185,2480.98 4204,2461.98 C34.1@4264.92,2461.98 ; 4190,2574 4190,2559 ; 4213,2536.17 4190,2559.17 4190,2553.37 4190,2559
  Bottom Layer w12: v1(2895,3348) 2895,3219 v1(3205,2909) ; 4343,2214 4388,2259 v1(4388,2406)
  Bottom Layer w15: v1(3205,2909) 3205,2454 3445,2214 4343,2214 ; 4400,2978.94 4561.06,3140 4564,3140 4563.98,3273.62 4538.39,3299.21 4538.39,3357.28 4569.88,3388.78 4569.88,3438.98 4457.68,3551.18 v1(4457.68,3727.36) ; 4403.54,2981.54 4368,2946 4368,2742 4403.54,2706.46 4604.01,2505.99 4667.24,2505.99 v1(4709.65,2505.91) v1@4713.5,2505.99
VCC_IN: C31.2 C35.1 L4.2 U20.4 U22.7 | length 1581.6
  Top Layer w12: v1(2990,2516) U20.4@3070.64,2516
  Top Layer w20: C31.2@3750,2280 3750,2242 3720,2212 L4.2@3720,2176.12 3841.88,2176.12 3870.9,2147.1 C35.1@3964.92,2147.1
  Bottom Layer w15: v1(2990,2516) 3083,2516 3415,2184 3863,2184 3899.9,2147.1 C35.1@3964.92,2147.1
VCC_PWR: C39.1 D4.3 J2.2 U3.9 U4.1 U4.3 U5.1 U5.3 U6.1 U6.3 U7.6 U7.8 U8.6 U8.8 U9.6 U9.8 | length 6703.1
  Top Layer w10: 2603.7,2999.65 2606.3,2997.05
  Top Layer w12: 2061,2958 2063.7,2960.7 2063.7,3009.3 ; U6.3@2383.35,3704.61 2451.89,3704.61 ; U6.1@2383.35,3804.61 2452.24,3804.61 ; U5.3@2383.35,3924.61 2452.17,3924.61 ; U5.1@2383.35,4024.61 2438.61,4024.61 2440,4026 ; U4.3@2383.35,4144.61 2450.87,4144.61 ; U4.1@2383.35,4244.61 2427.39,4244.61 2431.39,4244.61 2438,4238 2438,4212 2453,4197 2453,4142.47 ; 2452,4145.74 2450.87,4144.61 ; U3.9@2452.28,3444.33 2451.77,3676.18 2451.77,3704.49 2452.24,3704.96 2452.24,3924.53 2452,3924.77 2452,3939 2440,3951 2440,4022.61 2440,4026 ; 2440,4026 2453,4039 2453,4142.47 ; 2450.87,4144.61 2453,4142.47
  Top Layer w15: 2063.7,3009.3 U7.8@2063.7,3053.7 ; v1@2113,2958 v1(2115,2958) v1@2114,2958 ; 2154.36,2997.36 2163.7,2997.36 ; U7.6@2163.7,3053.7 2163.7,2997.36 ; 2283.7,2997.8 U8.8@2283.7,3053.7 ; 2383.7,2999.84 U8.6@2383.7,3053.7 ; U3.9@2452.28,3444.33 2490.59,3444.33 2524.68,3478.43 C39.1@2580,3478.43 2649.53,3478.43 2692.91,3435.04 2692.91,3013.78 2676.18,2997.05 2163.7,2997.36 ; 2503.7,2998.78 U9.8@2503.7,3053.7 ; 2603.7,2999.65 U9.6@2603.7,3053.7
  Top Layer w20: v1(2115,2958) 2154.36,2997.36
  Top Layer w30: v1(2115,2958) 2032,2958 2009,2935 2009,2062 2059,2012 2480.82,2012 D4.3@2588.82,2120
  Bottom Layer w20: v1(2115,2958) 2115,4205.55 2239.45,4330 2552,4330 2603.35,4381.35 2603.35,4381.89 2656.5,4435.04 2656.5,4642.72 2631,4668 J2.2@2566.93,4669.29
VDD_PLL: C5.1 C13.1 C16.1 U2.45 | length 1063.1
  Top Layer w10: U2.45@3835,4134.13 3881.61,4134.13 3891.73,4124.02 3891.73,4107.28 3891.73,4103.35 3948.82,4046.26 3952.76,4046.26 4125.54,4046.26 4125.54,4046.54 4152,4073 4376,4073 4410,4107 C13.1@4410,4140 4368,4140 4358,4150 4358,4328 4346,4340 C16.1@4310,4340 4310,4383 4320,4393 C5.1@4320,4430
pads on no net: D6.2 J5.3 J5.5 JM1.7 JM1.MH1 JM1.MH2 JM1.MH3 JM1.MH4 S1. S2. U2.1 U2.2 U2.3 U2.4 U2.5 U2.6 U2.7 U2.8 U2.9 U2.10 U2.11 U2.12 U2.13 U2.16 U2.17 U2.18 U2.19 U2.20 U2.21 U2.22 U2.23 U2.39 U2.40 U2.41 U2.51 U2.52 U2.53 U2.54 U2.55 U2.56 U2.58 U2.59 U2.61 U2.62 U2.63 U2.77 U2.78 U2.79 U2.88 U2.89 U2.90 U2.91 U2.92 U21.7 U22.2 U22.3 U22.5

## Polygon pours and split planes (outlines as drawn)
GND on Top Layer (hatched 90Degree grid 8 track 10, remove dead copper): 1975,2235 3455,2235 3455,2120 3805,2120 3805,1975 5115,1975 5115,4450 4975,4450 4975,4565 4610,4565 4610,5295 4255,5295 4255,5875 2835,5875 2835,5290 2475,5290 2475,5180 2670,5180 2670,4300 2525,4300 2525,3585 2680,3585 2680,3170 1975,3170
GND_PWR on Top Layer (hatched 90Degree grid 8 track 10, remove dead copper): 1975,3186 2664,3187.89 2665,3570 2488,3570 2488,4563 2113,4563 2112,4446 1974,4447
VCC_IN on Top Layer (hatched 90Degree grid 8 track 10, remove dead copper): 3911.42,2194.15 3911.98,2008 4537.4,2008 4537.4,2184 4537.4,2184.06 4537.4,2243.8 4520.67,2243.8 4520.67,2193.9 4520.64,2193.33 4520,2060.04 4520,2038.39 4020.92,2038.39 4020.92,2194.15
GND on Top Layer (hatched 90Degree grid 8 track 10, remove dead copper): 3898.62,2349.41 3898.62,2229.33 4044.29,2229.33 4044.29,2062.99 4488.19,2062.99 4495.08,2069.88 4495.08,2290.35 4503.94,2299.21 4610.24,2299.21 4618.11,2307.09 4618.11,2401.57 4609.25,2410.43 4454.72,2410.43 4454.72,2357.28 3895.67,2357.28
VCC_5V on Top Layer (hatched 90Degree grid 8 track 10, remove dead copper): 4180,2380.91 4429.92,2380.91 4429.92,2512.8 4441.73,2524.61 4605.31,2524.61 4718.5,2411.42 4718.5,2244.09 5048.23,2244.09 5048,2529.53 5040,2539.37 4180,2539.37 4180,2384
NetC37_1 on Top Layer (hatched 90Degree grid 8 track 10, remove dead copper): 4563,2249 4563,2235 4563,2226 4562.99,2038.39 4569.87,2029.54 5047.83,2029.54 5047.83,2193.91 4687,2193 4687.99,2277.56 4562.92,2277.21
VCC_3V on Top Layer (hatched 90Degree grid 8 track 10, remove dead copper): 4041,2797 3415,2797 3415,2381 4103,2382 4103,2797
GND on Bottom Layer (hatched 90Degree grid 8 track 10, remove dead copper): 1980,2229 3460,2229 3460,2114 3460,1968 3810,1969 5120,1969 5120,4444 4980,4444 4980,4559 4615,4559 4615,5289 4260,5289 4260,5869 2840,5869 2840,5284 2480,5284 2480,5174 2675,5174 2675,4294 2522,4294 2522,3592 2664,3592 2664,3164 1980,3164
GND_PWR on Bottom Layer (hatched 90Degree grid 8 track 10, remove dead copper): 1976,3187 2638,3187 2640,3569 2489,3569 2489,4562 2114,4562 2115.87,4448 1976,4448
VCC_3V on Bottom Layer (hatched 90Degree grid 8 track 10, remove dead copper): 4039,2803 3413,2803 3413,2387 4101,2388 4101,2803

## Keep-outs
Keep-Out Layer:
  lines w8: 1969,1969 1969,4453 2106,4453 2106,4570 2468,4570 2468,5300 2835,5300 2835,5878 4256,5878 4256,5300 4618,5300 4618,4570 4980,4570 4980,4453 5118,4453 5118,1969 1969,1969

## Other copper
Bottom Layer:
  text "GWY-C-09.06" at 5070,2015 h60

## Silkscreen, mask and mechanical layers (free items; w line width, h text height)
Top Overlay:
  text "Di" at 2834,5057.09 h40
  text "An" at 3031,5054 h40
  text "485" at 4633,3782 h40
  text "232" at 4858,3782 h40
  text "A" at 5017,3530 h60
  text "B" at 5017.28,3226.28 h60
  text "4-20" at 2304,2252 h40
  text "0-10" at 2530,2252 h40

## Text inside footprints (layer, text, board x,y; h text height)
BT1: Top Overlay "+" at 3103.03,3299.34 h60; Top Overlay "-" at 2909.13,3301.31 h60
C35: Top Overlay "+" at 3994.45,2000.45 h59.06 r90
D2: Top Overlay "+" at 2907,2213 h60 r180
D4: Top Overlay "+" at 2603,2155 h60
J5: Top Overlay "1" at 3411,3191 h50